# Altium PCB Panel.PcbDoc
Units mm, origin at the board's own origin, x right, y up, seen from the top; angles counter-clockwise.
Board outline 240 x 125 mm, 2 copper layers (Top Layer, Bottom Layer); 7 components, 0 nets, 0 pads, 126 vias.
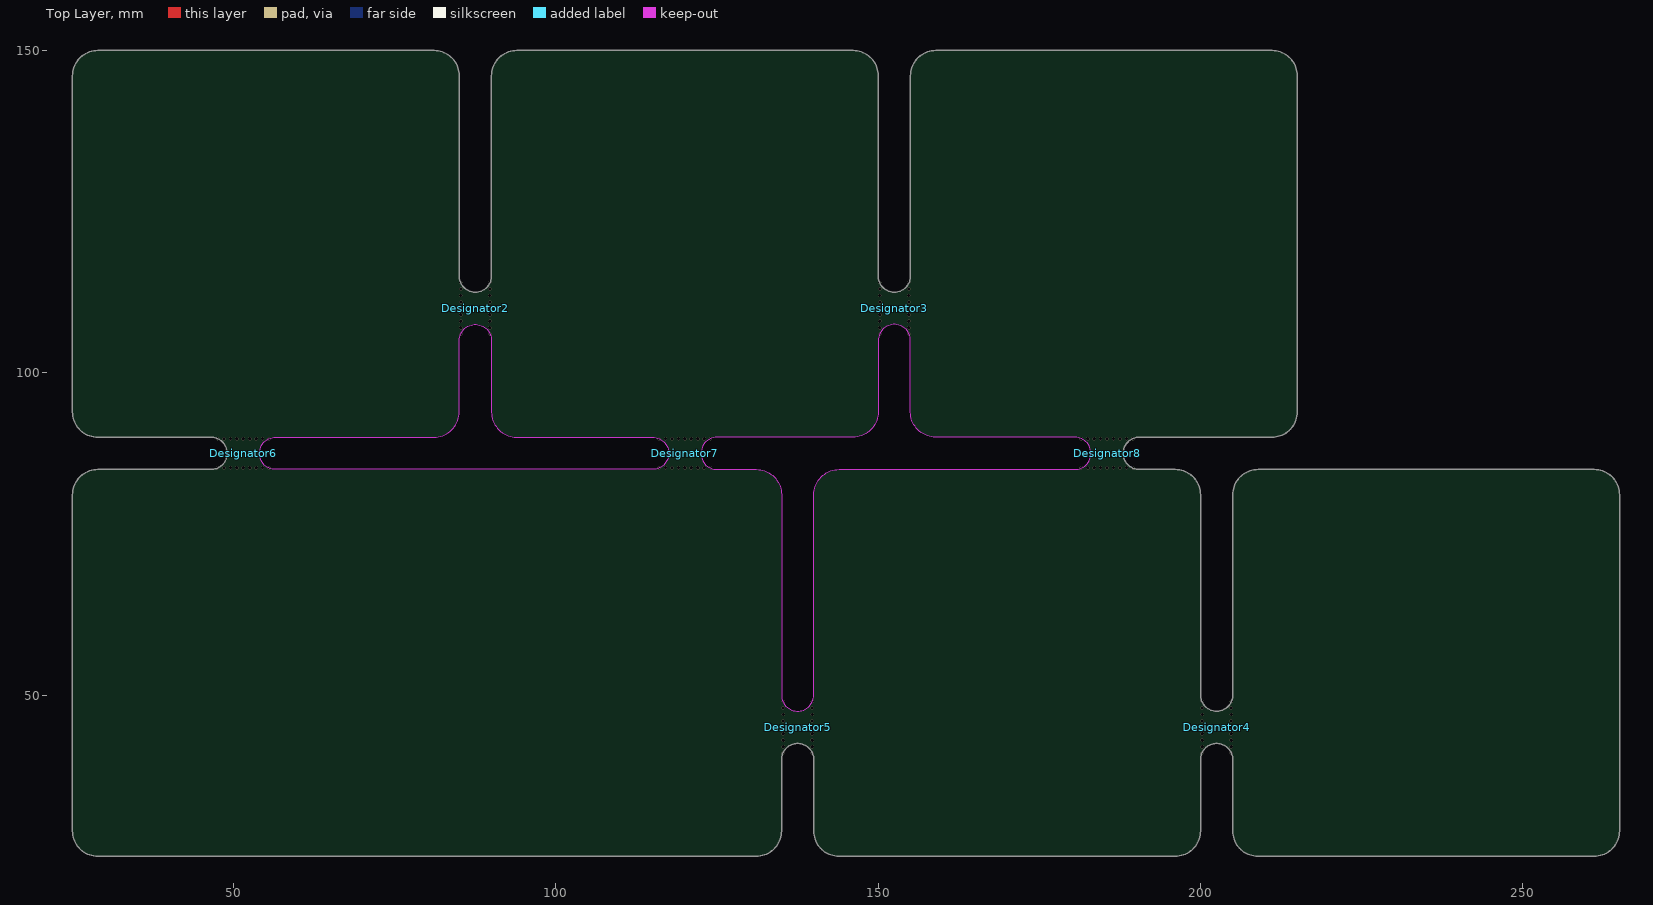
[diagram p0: Top Layer view]
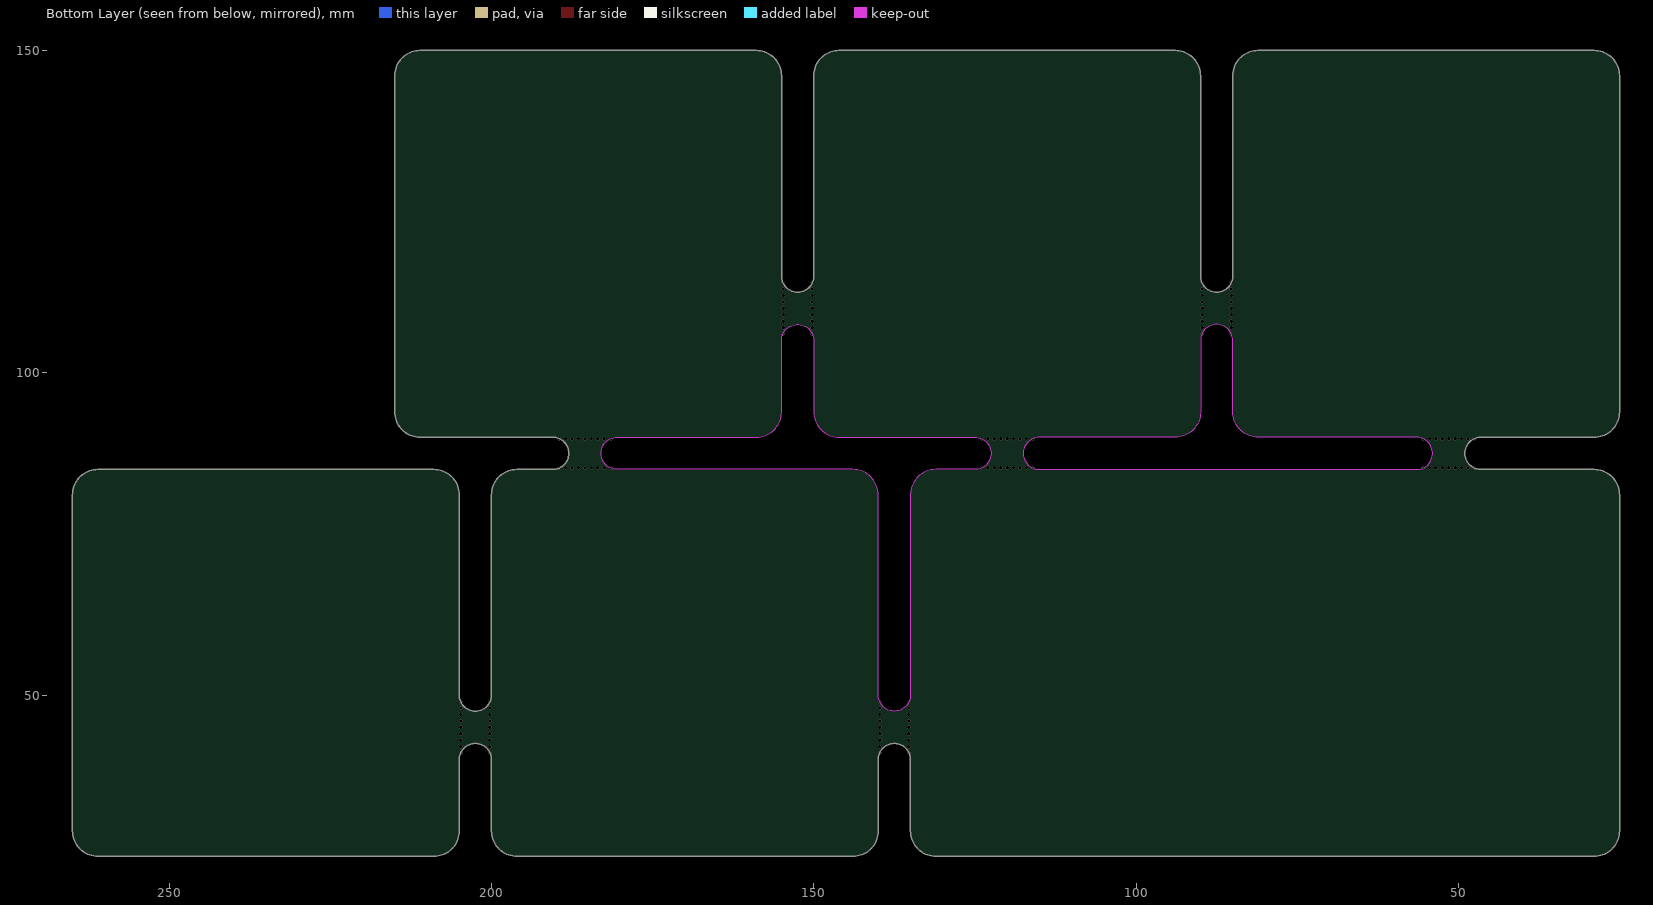
[diagram p1: Bottom Layer view, seen from below]

## Layer stack, top to bottom
Top Solder: solder mask 0.0102, Solder Resist, Dk 3.5
Top Layer: signal copper 0.0356
Dielectric 1: dielectric 0.32, FR-4, Dk 4.8
Bottom Layer: signal copper 0.0356
Bottom Solder: solder mask 0.0102, Solder Resist, Dk 3.5

## Board outline
25,81.075 cw(c28.925,81.075) 28.925,85 46.5,85 ccw(c46.5,87.5) 46.5,90 28.912,90 cw(c28.912,93.912) 25,93.912 25,146.075 cw(c28.925,146.075) 28.925,150 81.088,150 cw(c81.088,146.088) 85,146.088 85,115 ccw(c87.5,115) 90,115 90,146.075 cw(c93.925,146.075) 93.925,150 146.088,150 cw(c146.088,146.088) 150,146.088 150,115 ccw(c152.5,115) 155,115 155,146.075 cw(c158.925,146.075) 158.925,150 211.088,150 cw(c211.088,146.088) 215,146.088 215,93.925 cw(c211.075,93.925) 211.075,90 190.5,90 ccw(c190.5,87.5) 190.5,85 196.088,85 cw(c196.088,81.088) 200,81.088 200,50 ccw(c202.5,50) 205,50 205,81.075 cw(c208.925,81.075) 208.925,85 261.088,85 cw(c261.088,81.088) 265,81.088 265,28.925 cw(c261.075,28.925) 261.075,25 208.912,25 cw(c208.912,28.912) 205,28.912 205,40 ccw(c202.5,40) 200,40 200,28.925 cw(c196.075,28.925) 196.075,25 143.912,25 cw(c143.912,28.912) 140,28.912 140,40 ccw(c137.5,40) 135,40 135,28.925 cw(c131.075,28.925) 131.075,25 28.912,25 cw(c28.912,28.912) 25,28.912
cut-out: 56.5,85 cw(c56.5,87.5) 56.5,90 81.075,90 ccw(c81.075,93.925) 85,93.925 85,105 cw(c87.5,105) 90,105 90,93.912 ccw(c93.912,93.912) 93.912,90 115,90 cw(c115,87.5) 115,85
cut-out: 135,50 ccw(c137.5,50) 140,50 140,81.075 cw(c143.925,81.075) 143.925,85 180.5,85 ccw(c180.5,87.5) 180.5,90 158.912,90 cw(c158.912,93.912) 155,93.912 155,105 ccw(c152.5,105) 150,105 150,93.925 cw(c146.075,93.925) 146.075,90 125,90 ccw(c125,87.5) 125,85 131.088,85 cw(c131.088,81.088) 135,81.088

## Design rules (kind name [scope] priority, off if disabled: settings)
Clearance [All] p1: gap=0.254 ignorepadtopadclearanceinfootprint=FALSE except(0: Arc-Hole Track-Hole SMDPad-Hole THPad-Hole Via-Hole Fill-Hole Poly-Hole Region-Hole Text-Hole)
PolygonConnect [All] p1: connectstyle=Relief reliefconductorwidth=0.254 reliefentries=4 polygonreliefangle="90 Angle" airgapwidth=0.254
RoutingVias [All] p1: holewidth=0.711 width=1.27 viastyle="Through Hole" minholewidth=0.711 minwidth=1.27 maxholewidth=0.711 maxwidth=1.27
SolderMaskExpansion [All] p1: expansion=0.102 istentingtop=FALSE
Width [All] p1: maxlimit=0.254 minlimit=0.254 preferedwidth=0.254
30 further rules are at their usual default settings.

## Components (designator, comment, footprint, x,y, rotation, side; value= is the part's Value field where it differs from the comment)
Designator2 "Comment" MOUSE_BITES 87.5,110 r0 top
Designator3 "Comment" MOUSE_BITES 152.5,110 r0 top
Designator4 "Comment" MOUSE_BITES 202.5,45 r0 top
Designator5 "Comment" MOUSE_BITES 137.5,45 r0 top
Designator6 "Comment" MOUSE_BITES 51.5,87.5 r90 top
Designator7 "Comment" MOUSE_BITES 120,87.5 r90 top
Designator8 "Comment" MOUSE_BITES 185.5,87.5 r90 top

## Footprints (in the part's own frame and the unit in brackets; to place one, negate y for a bottom-side part, rotate by r counter-clockwise, add the part's x,y. Pads: shape width x height; smd on the part's side, far side on the other; paste and mask are expansions set on the pad)
MOUSE_BITES [mm]

## Via types
v1: diameter 0.5, hole 0.5, Top Layer to Bottom Layer, tented both sides, 126 vias

## Nets (pads, with @x,y where several pads share a name; then routed paths per layer and width w, separated by ;. In a path a pad name is that pad's centre, name@x,y a point inside that pad or via, vN(x,y) a via of type N, cw(c..) or ccw(c..) an arc to the next point about the centre after c; other vN are vias at no path point)
copper on no net:
  other v1: 135.25,41 139.75,41 200.25,41 204.75,41 135.25,42 139.75,42 200.25,42 204.75,42 135.25,43 139.75,43 200.25,43 204.75,43 135.25,44 139.75,44 200.25,44 204.75,44 135.25,45 139.75,45 200.25,45 204.75,45 135.25,46 139.75,46 200.25,46 204.75,46 135.25,47 139.75,47 200.25,47 204.75,47 135.25,48 139.75,48 200.25,48 204.75,48 135.25,49 139.75,49 200.25,49 204.75,49 47.5,85.25 48.5,85.25 49.5,85.25 50.5,85.25 51.5,85.25 52.5,85.25 53.5,85.25 54.5,85.25 55.5,85.25 116,85.25 117,85.25 118,85.25 119,85.25 120,85.25 121,85.25 122,85.25 123,85.25 124,85.25 181.5,85.25 182.5,85.25 183.5,85.25 184.5,85.25 185.5,85.25 186.5,85.25 187.5,85.25 188.5,85.25 189.5,85.25 47.5,89.75 48.5,89.75 49.5,89.75 50.5,89.75 51.5,89.75 52.5,89.75 53.5,89.75 54.5,89.75 55.5,89.75 116,89.75 117,89.75 118,89.75 119,89.75 120,89.75 121,89.75 122,89.75 123,89.75 124,89.75 181.5,89.75 182.5,89.75 183.5,89.75 184.5,89.75 185.5,89.75 186.5,89.75 187.5,89.75 188.5,89.75 189.5,89.75 85.25,106 89.75,106 150.25,106 154.75,106 85.25,107 89.75,107 150.25,107 154.75,107 85.25,108 89.75,108 150.25,108 154.75,108 85.25,109 89.75,109 150.25,109 154.75,109 85.25,110 89.75,110 150.25,110 154.75,110 85.25,111 89.75,111 150.25,111 154.75,111 85.25,112 89.75,112 150.25,112 154.75,112 85.25,113 89.75,113 150.25,113 154.75,113 85.25,114 89.75,114 150.25,114 154.75,114

## Silkscreen, mask and mechanical layers (free items; w line width, h text height)
Board Shape:
  lines w0.1: 46.5,85 28.925,85 ccw(c28.925,81.075) 25,81.075 25,28.912 ccw(c28.912,28.912) 28.912,25 131.075,25 ccw(c131.075,28.925) 135,28.925 135,40 ; 46.5,90 28.912,90 cw(c28.912,93.912) 25,93.912 25,96.5 25,146.075 cw(c28.925,146.075) 28.925,150 40,150 81.088,150 cw(c81.088,146.088) 85,146.088 85,115 ; 56.5,85 115,85 ; 56.5,90 81.075,90 ccw(c81.075,93.925) 85,93.925 85,105 ; 90,105 90,93.912 ccw(c93.912,93.912) 93.912,90 115,90 ; 90,115 90,146.075 cw(c93.925,146.075) 93.925,150 146.088,150 cw(c146.088,146.088) 150,146.088 150,115 ; 125,85 131.088,85 cw(c131.088,81.088) 135,81.088 135,50 ; 125,90 146.075,90 ccw(c146.075,93.925) 150,93.925 150,105 ; 140,40 140,28.912 ccw(c143.912,28.912) 143.912,25 196.075,25 ccw(c196.075,28.925) 200,28.925 200,40 ; 140,50 140,81.075 cw(c143.925,81.075) 143.925,85 180.5,85 ; 155,105 155,93.912 ccw(c158.912,93.912) 158.912,90 180.5,90 ; 155,115 155,146.075 cw(c158.925,146.075) 158.925,150 211.088,150 cw(c211.088,146.088) 215,146.088 215,93.925 cw(c211.075,93.925) 211.075,90 190.5,90 ; 190.5,85 196.088,85 cw(c196.088,81.088) 200,81.088 200,50 ; 205,40 205,28.912 ccw(c208.912,28.912) 208.912,25 261.075,25 ccw(c261.075,28.925) 265,28.925 265,81.088 ccw(c261.088,81.088) 261.088,85 208.925,85 ccw(c208.925,81.075) 205,81.075 205,50

## Panel: embedded boards
"..\..\BatteryHolder\BatteryHolder\BatteryHolder.PcbDoc" at 25,25, 1 rows x 1 columns, spacing 63.5 x 38.1, rotation 0
"..\..\CurrentSensor\CurrentSensor\CurrentSensor.PcbDoc" at 25,90, 1 rows x 1 columns, spacing 63.5 x 38.1, rotation 0
"..\..\OVPSwitch\OVPSwitch\OVPSwitch.PcbDoc" at 90,90, 1 rows x 1 columns, spacing 63.5 x 38.1, rotation 0
"..\..\RP2040Breakout\RP2040Breakout.PcbDoc" at 205,25, 1 rows x 1 columns, spacing 63.5 x 38.1, rotation 0
"..\..\SMPSBreakout\SMPSBreakout\SMPSBreakout.PcbDoc" at 155,90, 1 rows x 1 columns, spacing 63.5 x 38.1, rotation 0
"..\..\VoltageInput\VoltageInput\VoltageInput.PcbDoc" at 140,25, 1 rows x 1 columns, spacing 63.5 x 38.1, rotation 0